# Altium PCB di2_motor.PcbDoc
Units mm, origin at the board's own origin, x right, y up, seen from the top; angles counter-clockwise.
Board outline 37 x 16.5 mm, 2 copper layers (Top Layer, Bottom Layer), stack 0.325 mm thick; 33 components, 32 nets, 119 pads, 37 vias.
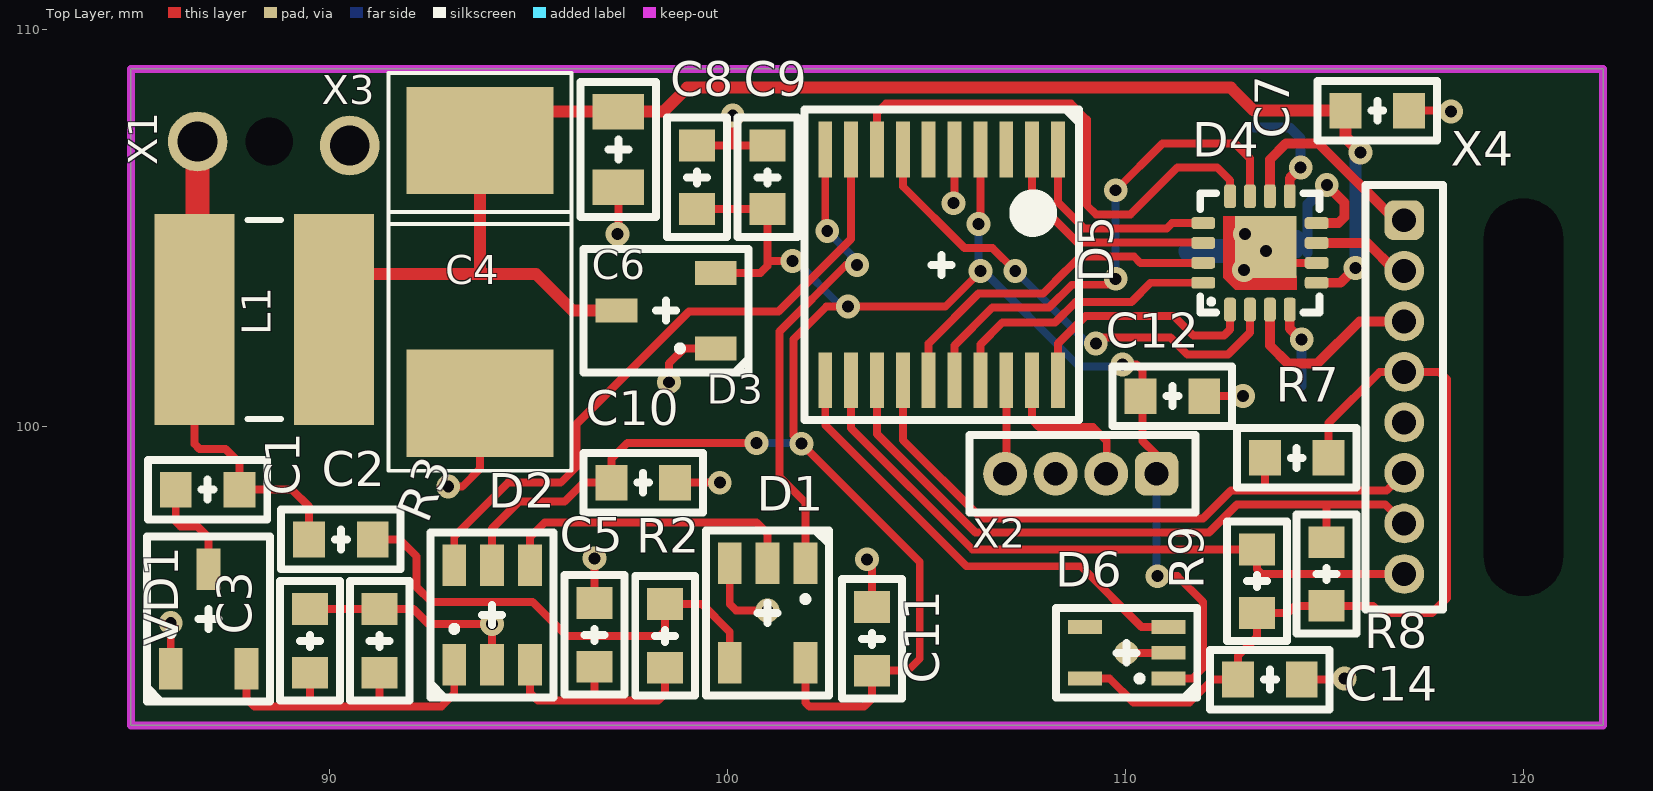
[diagram p0: Top Layer view]
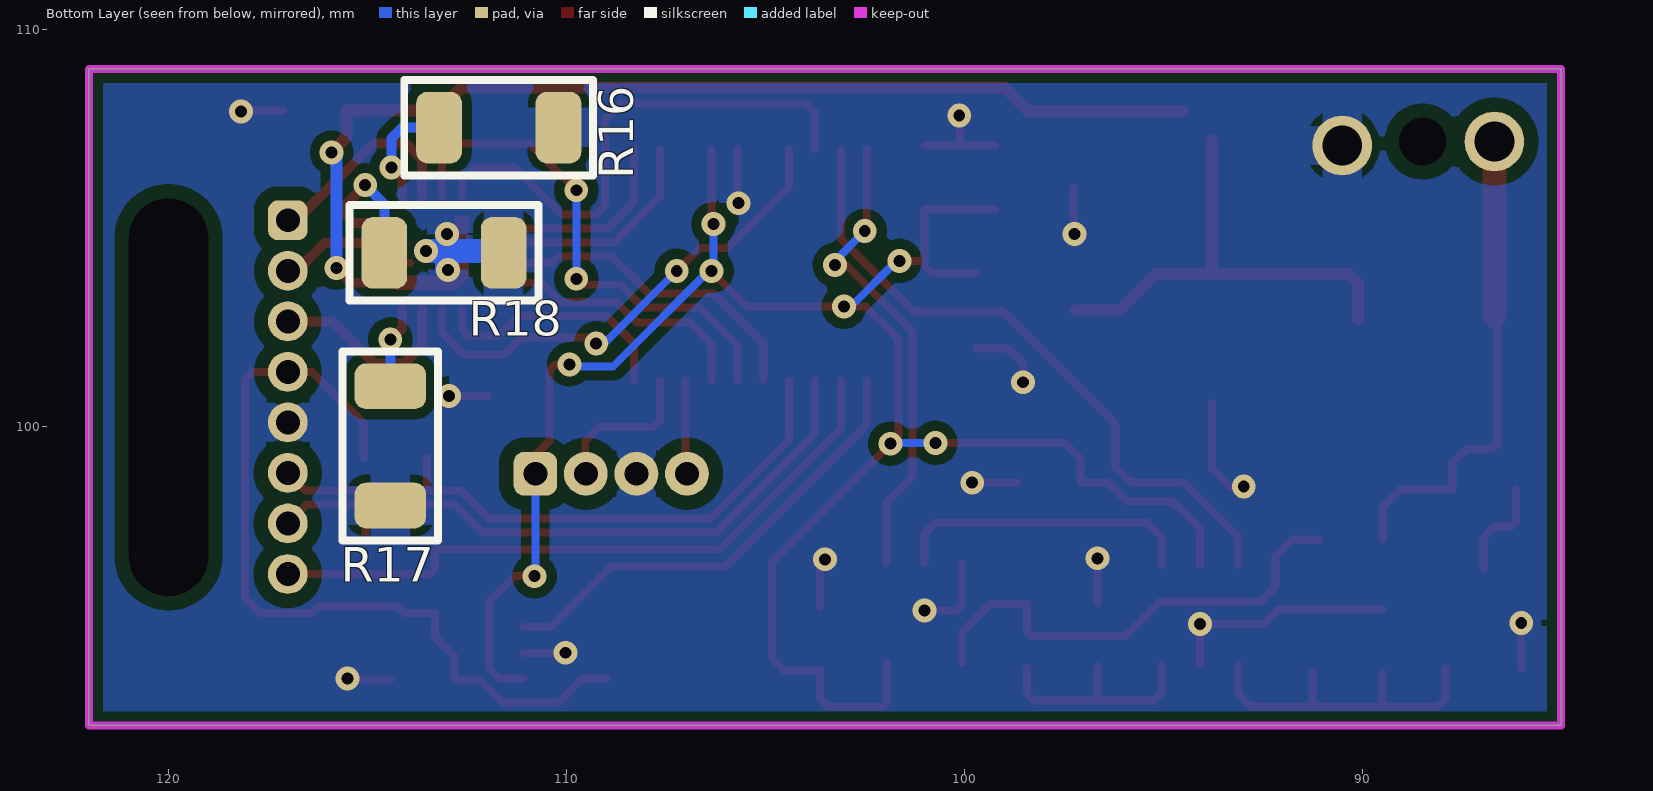
[diagram p1: Bottom Layer view, seen from below]
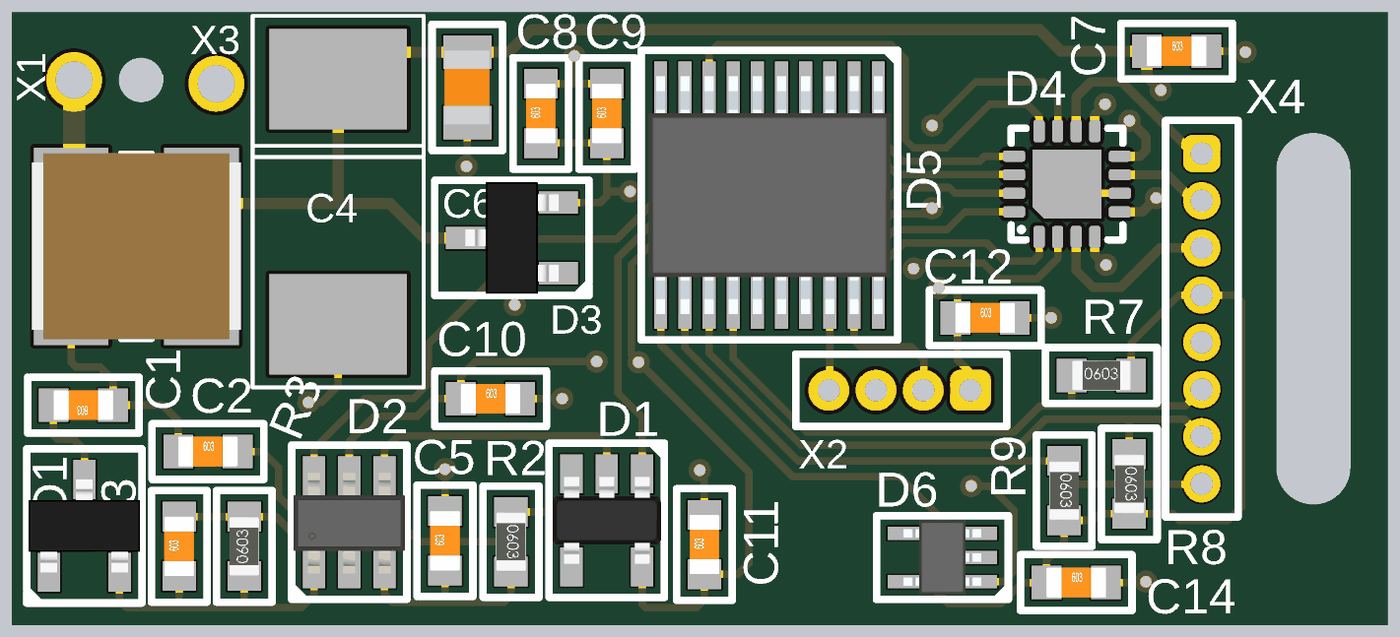
[diagram p2: 3D render of the assembled board from above, using the file's embedded part models]
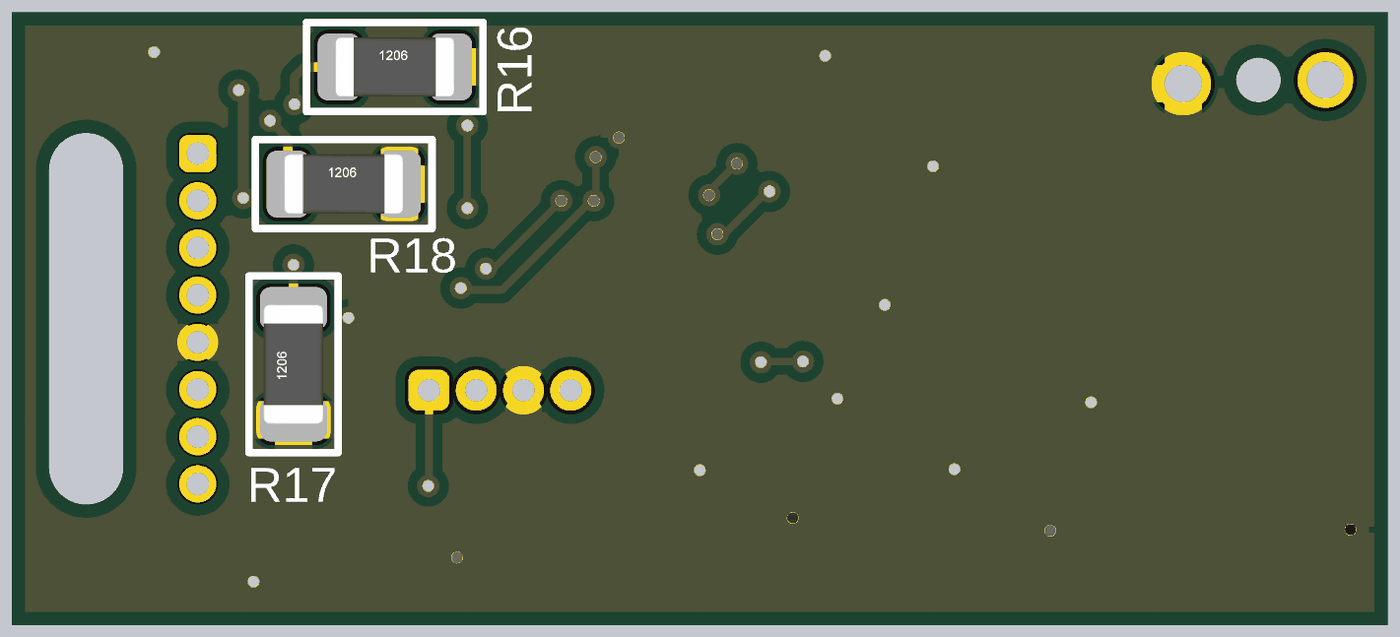
[diagram p3: 3D render of the assembled board from below, using the file's embedded part models]

## Layer stack, top to bottom
Top Solder: solder mask 0.0102, Solder Resist, Dk 3.5
Top Layer: signal copper 0.0356
Dielectric 1: core 0.254, FR-4, Dk 4.2
Bottom Layer: signal copper 0.0356
Solder Side: solder mask 0.0102, Solder Resist, Dk 3.5

## Board outline
85,92.5 122,92.5 122,109 85,109

## Design rules (kind name [scope] priority, off if disabled: settings)
Clearance [All] p1: gap=0.155 ignorepadtopadclearanceinfootprint=FALSE except(0: Arc-Hole Track-Hole SMDPad-Hole THPad-Hole Via-Hole Fill-Hole Poly-Hole Region-Hole Text-Hole; 0.255: Arc-Poly Track-Poly SMDPad-Poly Via-Poly Fill-Poly Poly-Poly Poly-Region Poly-Text; 0.355: THPad-Poly)
ComponentClearance [All] p1 off: gap=0.254 collisioncheckmode=3 verticalgap=0.254 showdistances=FALSE
HoleSize [All] p1: absolutevalues=TRUE maxlimit=10 minlimit=0.025 maxpercent=80.000 minpercent=20.000
MinimumSolderMaskSliver [All] p1 off: minsoldermaskwidth=0.1
PlaneConnect [All] p1: planeconnectstyle=Relief reliefexpansion=0.5 reliefentries=4 reliefconductorwidth=0.4 reliefairgap=0.4
PolygonConnect [All] p1: connectstyle=Relief reliefconductorwidth=1 reliefentries=4 polygonreliefangle="90 Angle" airgapwidth=0.2
RoutingVias [All] p1: holewidth=0.3 width=0.6 viastyle="Through Hole" minholewidth=0.3 minwidth=0.6 maxholewidth=0.3 maxwidth=0.6
SilkToBoardRegionClearance [All] p1 off:
SilkToSilkClearance [All] p1 off: silktosilkclearance=0.254
SilkToSolderMaskClearance [IsPad] p1 off: minsilkscreentomaskgap=0.254 clearancetoexposedcopper=TRUE
SolderMaskExpansion [All] p1: expansion=0.102
Width [All] p1: maxlimit=0.6 minlimit=0.2 preferedwidth=0.25
23 further rules are at their usual default settings.

## Components (designator, comment, footprint, x,y, rotation, side; value= is the part's Value field where it differs from the comment)
C1 "1.5nF" C0603 86.925,98.425 r180 top
C2 "1.5nF" C0603 90.275,97.175 r0 top
C3 "1.5nF" C0603 89.5,94.625 r90 top
C4 "К53-56" К53-56(4) 93.775,103.8 r270 top value=100uFx12.5V
C5 "1.5nF" C0603 96.65,94.775 r90 top
C6 "22u" C0805 97.25,106.975 r270 top
C7 "0.1uF" C0603 116.325,107.95 r0 top
C8 "0.1uF" C0603 99.225,106.275 r90 top
C9 "10u" C0603 101,106.275 r90 top
C10 "0.1uF" C0603 97.875,98.6 r0 top
C11 "0.1uF" C0603 103.625,94.675 r90 top
C12 "0.1uF" C0603 111.175,100.775 r0 top
C14 "1uF" C0603 113.625,93.65 r0 top
D1 "1G126" SOT23-5 101,95.325 r270 top
D2 "G14" SOT23-6 94.075,95.275 r90 top
D3 "MCP1702" SOT23 98.45,102.925 r180 top
D4 "STSPIN233" VFQFPN16L 113.375,104.375 r90 top
D5 "STM32G030F6" tssop20 105.375,104.075 r270 top locked
D6 "LDK220" SOT353 110.025,94.325 r180 top
L1 "VLS6045EX-100M" SRR4018 88.35,102.7 r180 top
R2 "10k" R0603 98.425,94.75 r270 top value=82K
R3 "10k" R0603 91.25,94.625 r90 top value=82K
R7 "4,7k" R0603 114.3,99.225 r0 top
R8 "4,7k" R0603 115.05,96.305 r270 top
R9 "4,7k" R0603 113.3,96.125 r270 top
R16 "0R33" R1206 111.7,107.525 r180 bottom value=82K
R17 "0R33" R1206 114.425,99.525 r90 bottom value=82K
R18 "0R33" R1206 113.075,104.375 r180 bottom value=82K
VD1 "BAS70-04" SOT23 86.95,95.175 r90 top
X1 "PLS-1" PLS-1.5 86.675,107.175 r270 top
X2 "PLS-4-1.27" PLS-4-1.27 108.875,98.825 r90 top
X3 "XS" 1.0x1.5 90.5,107.075 r0 top
X4 "PLS-8-2R" PLS-8-1.27 117,100.75 r180 top

## Footprints (in the part's own frame and the unit in brackets; to place one, negate y for a bottom-side part, rotate by r counter-clockwise, add the part's x,y. Pads: shape width x height; smd on the part's side, far side on the other; paste and mask are expansions set on the pad)
1.0x1.5 [mm] "XS 1.0x1.5"
  round 1.5 hole 1: 1(0,0)
C0603 [mm] "Chip Capacitor; Body 1.6 x 0.8 mm (LxW typ)"
  rect 0.8x0.9 smd mask+0.05: 1(-0.8,0) 2(0.8,0)
  silkscreen extent -1.5,-0.75 1.5,0.75, body extent -0.8,-0.4 0.8,0.4, height 0.3
C0805 [mm] "Capacitor Pattern"
  rect 0.9x1.3 smd mask+0.05: 1(-0.95,0) 2(0.95,0)
  silkscreen extent -1.7,-0.95 1.7,0.95, body extent -1,-0.63 1,0.62, height 0.6
PLS-1.5 [mm]
  round 0 hole 1.2 unplated mask+0.05: 0(0,1.8)
  round 1.5 hole 1: 1(0,0)
PLS-4-1.27 [mm]
  rrect50% 1.1x1.1 hole 0.6: 1(0,-1.905)
  round 1.1 hole 0.6: 2(0,-0.635) 3(0,0.635) 4(0,1.905)
  silkscreen extent -0.98,-2.88 0.98,2.79, body extent -0.98,-2.91 0.98,2.8, height 6
PLS-8-1.27 [mm]
  rrect50% 1x1 hole 0.6 mask+0.05: 1(0,-4.445)
  round 1 hole 0.6 mask+0.05: 2(0,-3.175) 3(0,-1.905) 4(0,-0.635) 5(0,0.635) 6(0,1.905) 7(0,3.175) 8(0,4.445)
  silkscreen extent -0.97,-5.34 0.97,5.34, body extent -0.98,-5.45 0.97,5.34, height 6
R0603 [mm]
  rect 0.8x0.9 smd mask+0.05: 1(-0.8,0) 2(0.8,0)
  silkscreen extent -1.5,-0.75 1.5,0.75, body extent -0.8,-0.4 0.8,0.4, height 0.44
R1206 [mm]
  rrect50% 1.15x1.8 smd: 1(-1.5,0) 2(1.5,0)
  silkscreen extent -2.38,-1.2 2.37,1.2, body extent -1.6,-0.8 1.6,0.8, height 1
SOT23 [mm]
  rect 1.05x0.6 smd mask+0.05: 1(-1.25,0.95) 2(-1.25,-0.95) 3(1.25,0)
  silkscreen extent -2.08,-1.55 2.08,1.55, body extent -1.25,-1.5 1.25,1.5, height 1.05
SOT23-5 [mm]
  rect 1.05x0.6 smd mask+0.05: 1(-1.25,0.95) 2(-1.25,0) 3(-1.25,-0.95) 4(1.25,-0.95) 5(1.25,0.95)
  silkscreen extent -2.08,-1.55 2.08,1.55, body extent -1.17,-1.46 1.17,1.46, height 1
SOT23-6 [mm]
  rect 1.05x0.6 smd mask+0.05: 1(-1.25,0.95) 2(-1.25,0) 3(-1.25,-0.95) 4(1.25,-0.95) 5(1.25,0) 6(1.25,0.95)
  silkscreen extent -2.08,-1.55 2.08,1.55, body extent -1.37,-1.5 1.33,1.5, height 1.05
SOT353 [mm]
  rect 0.85x0.35 smd mask+0.05: 1(-1.05,0.65) 2(-1.05,0) 3(-1.05,-0.65) 4(1.05,-0.65) 5(1.05,0.65)
  silkscreen extent -1.78,-1.13 1.78,1.12, body extent -1.05,-1 1.05,1, height 1.1
SRR4018 [mil]
  rect 79x209 smd: 1(69,0) 2(-69,0)
  silkscreen extent -16,-98 16,98, body extent -110,-98 111,99, height 91
tssop20 [mm] "TSOP, 20-Leads, Body 6.50x4.40mm, Pitch 0.65mm, IPC Medium Density"
  rect 1.4x0.35 smd mask+0.05: 1(-2.9,2.925) 2(-2.9,2.275) 3(-2.9,1.625) 4(-2.9,0.975) 5(-2.9,0.325) 6(-2.9,-0.325) 7(-2.9,-0.975) 8(-2.9,-1.625) 9(-2.9,-2.275) 10(-2.9,-2.925) 11(2.9,-2.925) 12(2.9,-2.275) 13(2.9,-1.625) 14(2.9,-0.975) 15(2.9,-0.325) 16(2.9,0.325) 17(2.9,0.975) 18(2.9,1.625) 19(2.9,2.275) 20(2.9,2.925)
  silkscreen extent -3.9,-3.45 3.9,3.45, body extent -3.2,-3.25 3.2,3.25, height 2.2
VFQFPN16L [mm]
  rrect50% 0.6x0.3 smd: 1(-1.425,0.75) 2(-1.425,0.25) 3(-1.425,-0.25) 4(-1.425,-0.75) 9(1.425,-0.75) 10(1.425,-0.25) 11(1.425,0.25) 12(1.425,0.75)
  rrect50% 0.3x0.6 smd: 5(-0.75,-1.425) 6(-0.25,-1.425) 7(0.25,-1.425) 8(0.75,-1.425) 13(0.75,1.425) 14(0.25,1.425) 15(-0.25,1.425) 16(-0.75,1.425)
  rect 1.55x1.55 smd: 17(0.15,-0.15)
  Top Layer region: -0.925,-0.925 -0.925,0.625 -0.625,0.925 0.925,0.925 0.925,0.575 -0.575,0.575 -0.575,-0.925
  silkscreen extent -1.5,-1.5 1.5,1.5, body extent -1.55,-1.55 1.55,1.55, height 1.01
К53-56(4) [mm] "чип-конденсатор танталовый, 7.1x4.5х2.8 мм"
  rect 2.7x3.7 smd: 1(-3.4,0) 2(3.2,0)
  silkscreen extent -5.1,-2.3 4.9,2.3, body extent -4,-2.2 3.8,2.2, height 3.11

## Part data
C1 C2 C3 C5 C6 C7 C8 C9 C10 C11 C12 C14: library part К10-69в, "чип-конденсатор"
C4: "чип-конденсатор танталовый"
D1: library part SN74LVC1G126, "Буфер"
D2: library part SN74LVC2G14, "Триггер шмидта"
D3: "LDO uPower regulator 250mA"
D4: "1.3A BLDC motor driver"
D5: "STM32 ARM-based 32-bit MCU with 23 Kbytes Flash, 20-pin TSSOP"
D6: library part LP2985, "LDO linear regulator 150mA"
L1: library part ДМ, "дросель ДМ"
R2 R3 R16 R17 R18: library part Р1-16П-0,062, "чип-резистор 0805, 2.1х1.3 мм, 0.062 Вт"
R7 R8 R9: library part Р1-12-0,125, "чип-резистор 0805, 2.1х1.3 мм, 0.125 Вт"
VD1: "SMD-SOT23 70V 0.2A 5nS", Price=0.08
X1: "Header, 1-Pin", LatestRevisionDate=17-Jul-2002, LatestRevisionNote="Re-released for DXP Platform.", Publisher="Altium Limited"
X3: "контакт"

## Free pads (board coordinates)
  round 0 hole 2 slot 10 at 90 deg unplated: 5(120,100.75)

## Via types
v1: diameter 0.6, hole 0.3, Top Layer to Bottom Layer, tented both sides, 37 vias

## Nets (pads, with @x,y where several pads share a name; then routed paths per layer and width w, separated by ;. In a path a pad name is that pad's centre, name@x,y a point inside that pad or via, vN(x,y) a via of type N, cw(c..) or ccw(c..) an arc to the next point about the centre after c; other vN are vias at no path point)
3v3: C8.1 C9.1 C10.1 C11.1 C12.1 D1.5 D2.5 D3.2 D5.4 D6.1 X2.1 | length 54
  Top Layer w0.2: D2.5 94.075,97.45 94.75,98.125 95.9,98.125 96.375,98.6 C10.1 97.075,99.2 97.475,99.6 v1(100.725,99.6) ; C8.1 C9.1 101,104.05 100.825,103.875 D3.2 ; 101.125,104.175 v1(101.625,104.175) ; D1.5 101.95,93.075 102.05,92.975 103.425,92.975 103.625,93.175 C11.1 104.525,93.875 104.825,94.175 104.825,96.61 101.655,99.78 101.655,102.205 102.475,103.025 v1(103.025,103.025) 105.466,103.025 v1@106.358,103.917 ; v1(106.3,105.1) 106.35,105.15 D5.4 ; v1(109.925,101.575) 110.275,101.575 110.425,101.425 110.425,99.65 110.78,99.295 X2.1 ; v1(110.8,96.25) 111.3,96.25 111.95,95.6 111.95,93.95 111.675,93.675 D6.1
  Bottom Layer w0.2: v1(100.725,99.6) 101.835,99.6 v1(101.855,99.58) ; v1(101.625,104.175) 101.7,104.175 102.85,103.025 v1(103.025,103.025) ; v1(106.3,105.1) 106.3,104.048 108.823,101.525 v1@109.85,101.525 ; X2.1 110.78,96.27 v1(110.8,96.25)
  other v1: 106.35,103.925
3v3_Hall: C14.1 D6.5 R7.2 R8.2 R9.2 X4.4 | length 21.2
  Top Layer w0.2: D6.5 109.6,93.675 110.2,93.075 111.6,93.075 112.175,93.65 C14.1 112.825,94.25 113.3,94.725 R9.2 114.075,95.325 114.255,95.505 R8.2 116.22,95.505 116.4,95.325 117.7,95.325 118.075,95.7 118.075,101.2 117.89,101.385 X4.4 116.385,101.385 115.1,100.1 R7.2
EN: D4.13 D5.1 | length 5.3
  Top Layer w0.2: D5.1 108.3,105.65 108.96,104.99 111.034,104.99 111.169,105.125 D4.13
EnU: D4.2 D5.7 | length 12.3
  Top Layer w0.2: D5.7 104.4,106.05 105.95,104.5 106.65,104.5 v1(107.225,103.925) ; v1@109.25,102.25 111.125,102.25 111.55,101.825 112.575,101.825 113.125,102.375 D4.2
  Bottom Layer w0.2: v1(107.225,103.925) 109.05,102.1 v1(109.25,102.1)
EnV: D4.16 D5.17 | length 7.1
  Top Layer w0.2: D5.17 106.35,102.075 106.9,102.625 108.225,102.625 108.745,103.145 110.145,103.145 110.625,103.625 D4.16
EnW: D4.12 D5.8 | length 13.3
  Top Layer w0.2: D5.8 103.75,107.9 103.975,108.125 108.625,108.125 109.025,107.725 109.025,105.575 109.255,105.345 110.12,105.345 111.3,106.525 112.3,106.525 112.625,106.2 D4.12
GND: C3.2 C4.2 C5.2 C6.2 C7.2 C8.2 C9.2 C10.2 C11.2 C12.2 C14.2 D1.3 D2.2 D3.1 D4.6 D4.17 D5.5 D6.2 R3.2 R16.2 R17.1 R18.2 VD1.1 X2.3 X3.1 X4.5 | length 29.8
  Top Layer w0.2: VD1.1 v1(86,95.075) ; C3.2 R3.2 92.1,95.425 92.475,95.05 v1(94.075,95.05) D2.2 ; v1(92.975,98.5) 93.325,98.5 93.775,98.95 C4.2 ; C5.2 v1(96.65,96.7) ; v1(97.225,104.85) 97.25,104.875 C6.2 ; v1(98.525,101.125) 98.525,101.6 98.9,101.975 D3.1 ; C10.2 v1(99.8,98.6) ; C8.2 100.113,107.075 ; D1.3 100.05,95.55 100.211,95.389 v1(101,95.389) ; v1(100.125,107.825) 100.113,107.813 100.113,107.075 ; C9.2 100.113,107.075 ; v1(103.5,96.675) 103.625,96.55 C11.2 ; v1(105.675,105.625) 105.7,105.65 D5.5 ; v1(110.025,94.325) D6.2 ; C12.2 v1(112.95,100.775) ; D4.17@113.925,104.125 D4.6 ; C14.2 115.475,93.65 v1(115.5,93.675) ; C7.2 118.15,107.95 v1(118.175,107.925)
  Bottom Layer w0.6: R18.2@111.625,104.425 113,104.425 ; v1@113,103.975 113,104.425 ; v1(113,104.85) 113,104.425 ; v1(113.525,104.425) 113,104.425
  other v1: 112.975,103.95
H_A: D5.14 R7.1 X4.6 | length 16.2
  Top Layer w0.2: D5.14 104.4,99.675 106.375,97.7 111.946,97.7 112.651,98.405 116.56,98.405 X4.6 ; 113.5,98.43 R7.1
H_B: D5.13 R8.1 X4.7 | length 17.1
  Top Layer w0.2: D5.13 103.75,99.823 106.228,97.345 112.093,97.345 112.798,98.05 115.05,98.05 ; R8.1 115.05,98.05 ; X4.7 116.525,98.05 115.05,98.05
H_C: D5.12 R9.1 X4.8 | length 16.9
  Top Layer w0.2: D5.12 103.1,99.971 106.146,96.925 R9.1 113.3,96.425 113.425,96.3 X4.8@117,96.3
InU: D4.1 D5.20 | length 6.3
  Top Layer w0.2: D5.20 108.3,102.1 108.99,102.79 111.21,102.79 111.7,102.3 112.475,102.3 112.625,102.45 D4.1
InV: D4.15 D5.15 | length 8.8
  Top Layer w0.2: D5.15 105.05,102.1 106.305,103.355 107.928,103.355 108.503,103.93 108.505,103.93 108.855,104.28 110.214,104.28 110.369,104.125 D4.15
InW: D4.11 D5.16 | length 12.8
  Top Layer w0.2: D5.16 105.7,102.05 106.65,103 108.075,103 108.65,103.575 109.6,103.575 v1(109.75,103.725) ; v1(109.75,105.95) 110.925,107.125 112.75,107.125 113.125,106.75 D4.11
  Bottom Layer w0.2: v1(109.75,103.725) v1(109.75,105.95)
NetC1_2: C1.2 VD1.3 | length 2.6
  Top Layer w0.2: C1.2 86.125,97.625 86.25,97.5 86.675,97.5 86.95,97.225 VD1.3
NetC2_2: C2.2 D1.4 R2.1 | length 12.2
  Top Layer w0.2: C2.2 91.75,97.175 92.175,96.75 92.175,95.975 92.545,95.605 95.095,95.605 95.95,94.75 98.3,94.75 98.425,94.875 R2.1 99.35,95.55 100.05,94.85 D1.4
NetC3_1: C3.1 D2.1 R3.1 VD1.2 | length 8.5
  Top Layer w0.2: VD1.2 87.9,93.175 88.1,92.975 92.8,92.975 93.125,93.3 D2.1 ; 89.5,93.025 C3.1 ; 91.25,93 R3.1
NetC5_1: C5.1 D2.3 R2.2 | length 5.7
  Top Layer w0.2: D2.3 95.025,93.325 95.225,93.125 98.25,93.125 98.425,93.3 R2.2 ; 96.65,93.15 C5.1
NetD1_2: D1.2 D2.4 | length 7.7
  Top Layer w0.2: D2.4 95.025,97.225 95.4,97.6 100.725,97.6 101,97.325 D1.2
NetD4_4: D4.4 R17.2 | length 2.1
  Top Layer w0.25: D4.4 114.125,102.475 114.425,102.175 v1(114.425,102.2)
  Bottom Layer w0.25: R17.2 v1(114.425,102.2)
NetD4_8: D4.8 R18.1 | length 4.4
  Top Layer w0.25: D4.8 115.35,105.125 115.5,105.275 115.5,105.636 v1(115.056,106.08)
  Bottom Layer w0.25: R18.1@114.325,104.375 114.325,104.825 R18.1@114.55,104.6 ; R18.1 114.575,105.6 v1(115.056,106.08)
NetD4_9: D4.9 R16.1 | length 2.9
  Top Layer w0.25: D4.9 114.125,106.25 v1(114.4,106.525)
  Bottom Layer w0.25: R16.1 114.125,107.525 114.4,107.25 v1(114.4,106.525)
NetD5_11: D5.11 D6.3 | length 11.9
  Top Layer w0.2: D5.11 102.45,100.05 106,96.5 108.875,96.5 110.4,94.975 D6.3
OutU: D4.3 X4.3 | length 4.9
  Top Layer w0.25: D4.3 113.625,102.05 114.075,101.6 114.825,101.6 115.88,102.655 X4.3
OutV: D4.7 X4.2 | length 2.5
  Top Layer w0.25: D4.7 116.075,104.625 116.775,103.925 X4.2
OutW: D4.10 X4.1 | length 5.3
  Top Layer w0.25: D4.10 113.625,106.725 114.025,107.125 114.85,107.125 116.78,105.195 X4.1
RX: D1.1 D5.10 | length 11.9
  Top Layer w0.2: D1.1 101.95,98.1 101.3,98.75 101.3,102.4 102.975,104.075 v1(103.25,104.075) ; v1@102.4,105.05 102.45,105.05 D5.10
  Bottom Layer w0.2: v1(102.5,104.925) 103.25,104.175 v1(103.25,104.075)
Stb: D4.14 D5.2 | length 6
  Top Layer w0.2: D5.2 107.65,105.778 108.793,104.635 111.94,104.635 D4.14
SWC: D5.19 X2.2 | length 3.9
  Top Layer w0.2: D5.19 107.65,100.175 107.825,100 109.175,100 109.525,99.65 109.525,98.84 X2.2
SWD: D5.18 X2.4 | length 2.3
  Top Layer w0.2: X2.4@107,98.855 D5.18
TX: D2.6 D5.9 | length 16.7
  Top Layer w0.2: D2.6 93.125,97.25 94.475,98.6 95.8,98.6 96.2,99 96.2,100.075 99.025,102.9 101.275,102.9 103.1,104.725 D5.9
VIN: C4.1 C6.1 C7.1 D3.3 D4.5 L1.2 | length 38.6
  Top Layer w0.25: D4.5 115.4,103.625 v1(115.775,104)
  Top Layer w0.3: L1.2 90.103,103.603 90.35,103.85 95.175,103.85 96.1,102.925 D3.3 ; 93.775,103.85 C4.1 ; C4.1@94.5,107.925 C6.1 98.375,107.925 98.98,108.53 112.645,108.53 113.225,107.95 C7.1 115.525,107.278 v1@115.903,106.9
  Bottom Layer w0.3: v1(115.775,104) 115.775,106.775 v1(115.9,106.9)
VOUT: C1.1 C2.1 L1.1 X1.1 | length 12.4
  Top Layer w0.2: L1.1@86.675,102.778 L1.1 86.597,99.578 86.725,99.45 87.375,99.45 87.725,99.1 C1.1 89.05,98.425 89.475,98 C2.1
  Top Layer w0.6: L1.1@86.675,102.778 X1.1
pads on no net: D5.3 D5.6 D6.4 X1.0

## Polygon pours and split planes (outlines as drawn)
GND on Bottom Layer "Top-No Net" (solid, remove dead copper, pour order 2): 85,92.5 122,92.5 122,109 85,109

## Keep-outs
Keep-Out Layer:
  the board outline again, w0.2

## Silkscreen, mask and mechanical layers (free items; w line width, h text height)
Mechanical 1:
  the board outline again, w0.1